# Altium PCB PCB_AgOpenGPS_RTU_2020-12-27_17-55-25.pcbdoc
Units mm, origin at the board's own origin, x right, y up, seen from the top; angles counter-clockwise.
Board outline 75.74 x 81.72 mm, 2 copper layers (Top Layer, Bottom Layer); 14 components, 22 nets, 130 pads, 27 vias.
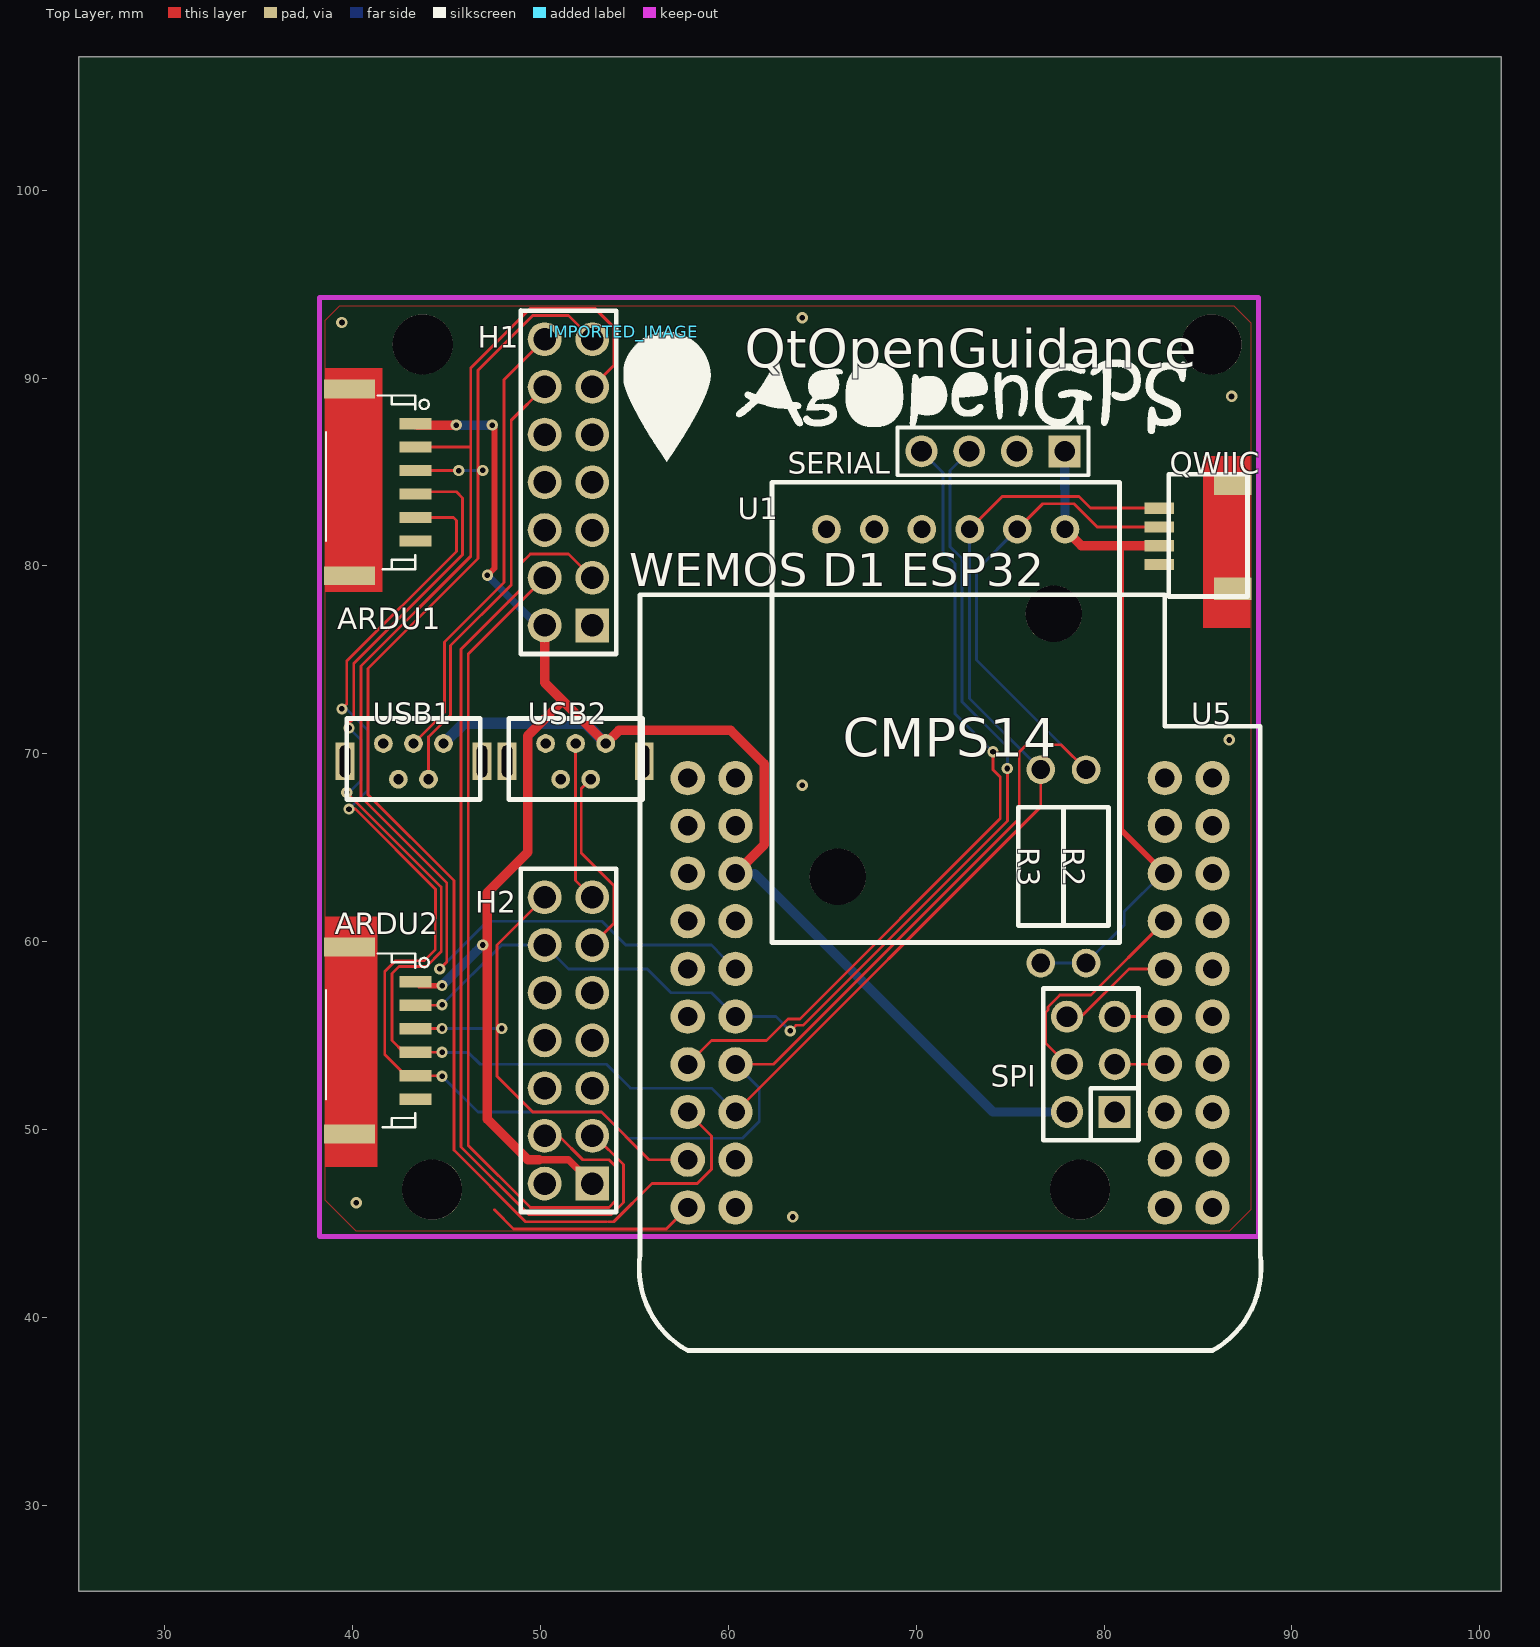
[diagram p0: Top Layer view]
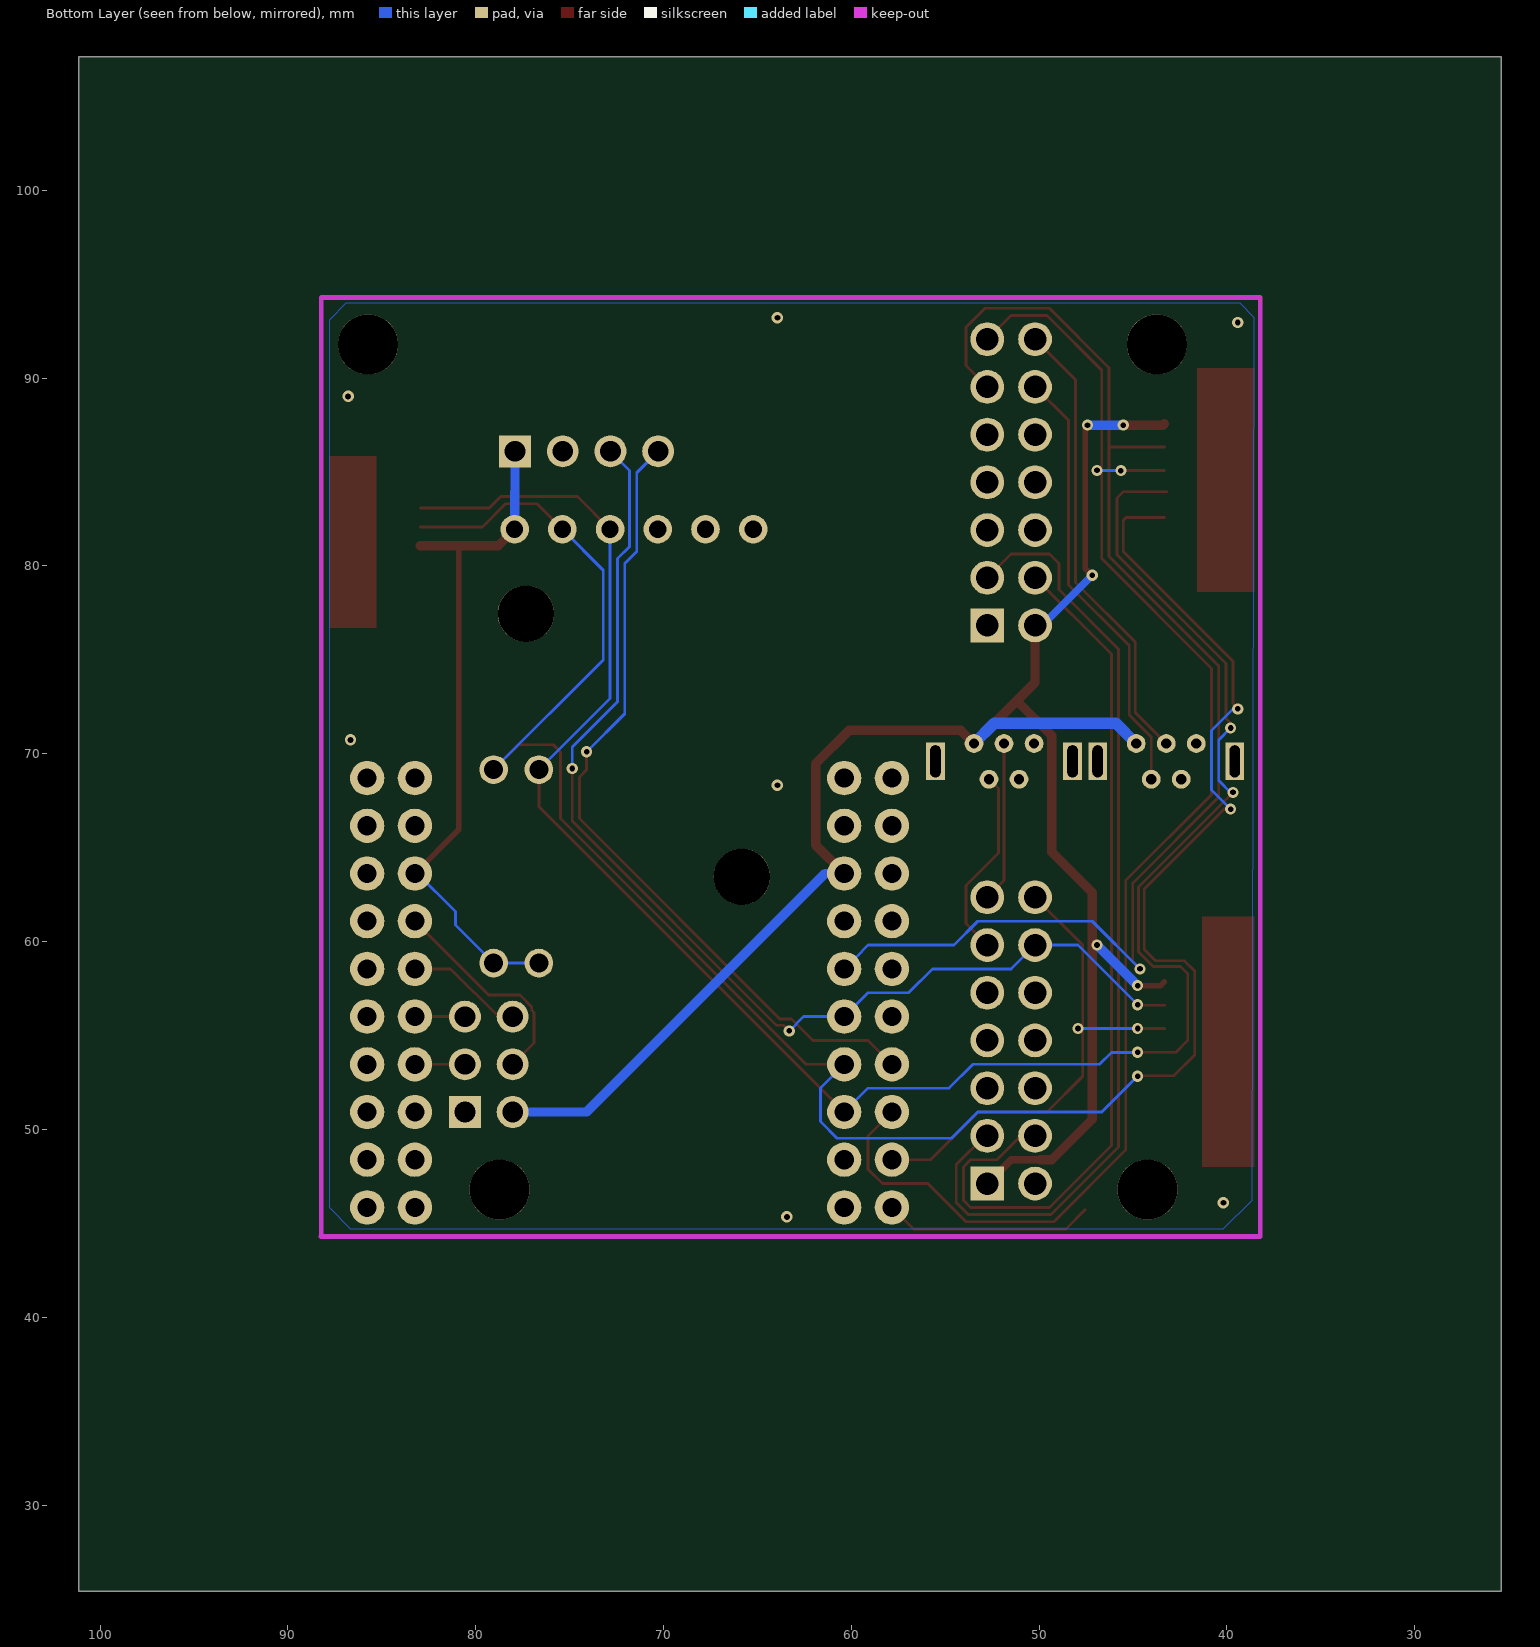
[diagram p1: Bottom Layer view, seen from below]

## Layer stack, top to bottom
Top Layer: signal copper (thickness not stored)
Dielectric: dielectric 0.32, FR-4, Dk 4.8
Bottom Layer: signal copper (thickness not stored)

## Board outline
101.143,25.4 25.4,25.4 25.4,107.124 101.143,107.124

## Components (designator, comment, footprint, x,y, rotation, side; value= is the part's Value field where it differs from the comment)
ARDU1 "SM06B-GHS-TB(LF)(SN)" CONN-TH_SM06B-GHS-TB-LF-SN 41.58,84.455 r270 top
ARDU2 "SM06B-GHS-TB(LF)(SN)" CONN-TH_SM06B-GHS-TB-LF-SN 41.58,54.737 r270 top
H1 "A2541WV-2X7P" HDR-TH_14P-P2.54-V-R2-C7-S2.54_A2541WV-2X7P 51.486,84.455 r90 top
H2 "A2541WV-2X7P" HDR-TH_14P-P2.54-V-R2-C7-S2.54_A2541WV-2X7P 51.486,54.737 r90 top
IMPORTED_IMAGE "IMPORTED_IMAGE" IMPORTED_IMAGE 54.42,92.466 r0 top
QWIIC "QWIIC SMD JST" "QWIIC CONNECTOR" 83.744,81.28 r90 top
R2 "2.2K" RES-TH_BD2.4-L6.3-P10.30-D0.6 79.045,64.008 r270 top
R3 "2.2K" RES-TH_BD2.4-L6.3-P10.30-D0.6 76.632,64.008 r270 top
SERIAL "A2541WV-4P" HDR-TH_4P-P2.54-V 74.092,86.106 r180 top
SPI "PM254V-12-06-H85" HDR-TH_6P-P2.54-V-F-R2-C3-S2.54 79.299,53.467 r90 top
U1 "CMPS14" CMPS14 80.823,84.455 r270 top
U5 "TG_WEMOS_D1_ESP32(CLONE)" "WEMOS-D1 ESP32" 85.776,43.307 r180 top
USB1 "USB-MINI-6.9X10.H-H3.9-DIP-V" MINI-USB-TH_C13453 43.231,69.596 r180 top
USB2 "USB-MINI-6.9X10.H-H3.9-DIP-V" MINI-USB-TH_C13453 51.867,69.596 r180 top

## Footprints (in the part's own frame and the unit in brackets; to place one, negate y for a bottom-side part, rotate by r counter-clockwise, add the part's x,y. Pads: shape width x height; smd on the part's side, far side on the other; paste and mask are expansions set on the pad)
CMPS14 [mm]
  round 1.524 hole 0.914: 1(2.5,-2.9) 2(2.5,-5.44) 3(2.5,-7.98) 4(2.5,-10.52) 5(2.5,-13.06) 6(2.5,-15.6)
  round 3 hole 3 unplated: ""(7,-3.5) ""(21,-15)
  silkscreen extent 0,-18.5 24.5,0
CONN-TH_SM06B-GHS-TB-LF-SN [mil]
  rect 23.6x67 smd: 1(-123.05,68.87) 2(-73.84,68.87) 4(24.59,68.88) 5(73.8,68.88)
  rect 23.7x67 smd: 3(-24.62,68.88) 6(123.01,68.88)
  rect 39.4x106.3 smd: 7(-195.85,-68.86) 8(195.85,-68.87)
  silkscreen extent -182,-118 182,97
HDR-TH_4P-P2.54-V [mm]
  rect 1.7x1.7 hole 1.1: 1(-3.81,0)
  round 1.7 hole 1.1: 2(-1.27,0) 3(1.27,0) 4(3.81,0)
  silkscreen extent -5.08,-1.27 5.08,1.27
HDR-TH_6P-P2.54-V-F-R2-C3-S2.54 [mm]
  rect 1.7x1.7 hole 1.1: 1(-2.54,-1.27)
  round 1.7 hole 1.1: 2(-2.54,1.27) 3(0,-1.27) 4(0,1.27) 5(2.54,-1.27) 6(2.54,1.27)
  silkscreen extent -4.04,-2.54 4.04,2.54
HDR-TH_14P-P2.54-V-R2-C7-S2.54_A2541WV-2X7P [mm]
  rect 1.8x1.8 hole 1.2: 1(-7.62,-1.27)
  round 1.8 hole 1.2: 2(-7.62,1.27) 3(-5.08,-1.27) 4(-5.08,1.27) 5(-2.54,-1.27) 6(-2.54,1.27) 7(0,-1.27) 8(0,1.27) 9(2.54,-1.27) 10(2.54,1.27) 11(5.08,-1.27) 12(5.08,1.27) 13(7.62,-1.27) 14(7.62,1.27)
  silkscreen extent -9.14,-2.54 9.14,2.54
IMPORTED_IMAGE [mm]
  silkscreen extent 0,-6.92 29.95,0
MINI-USB-TH_C13453 [mm]
  round 1 hole 0.55: 1(-1.6,-0.95) 2(-0.8,0.95) 3(0,-0.95) 4(0.8,0.95) 5(1.6,-0.95)
  rect 1x2 hole 0.55 slot 1.7 at 90 deg: 6(3.65,0) 7(-3.65,0)
  silkscreen extent -3.56,-2.29 3.56,2.03
"QWIIC CONNECTOR" [mm]
  rect 0.6x1.55 smd: 1(-1.2,0.8) 2(-0.2,0.8) 3(0.8,0.8) 4(1.8,0.8)
  rect 1.2x2 smd: 5(3.1,-3.1) 6(-2.5,-3.1)
  silkscreen extent -2.9,-3.9 3.6,0.3
RES-TH_BD2.4-L6.3-P10.30-D0.6 [mm]
  round 1.524 hole 1: 1(-5.15,0) 2(5.15,0)
  silkscreen extent -3.15,-1.2 3.15,1.2
"WEMOS-D1 ESP32" [mil]
  round 72 hole 40: 1(0,-100) 2(100,-100) 3(1000,-100) 4(1100,-100) 5(0,-200) 6(100,-200) 7(1000,-200) 8(1100,-200) 9(0,-300) 10(100,-300) 11(1000,-300) 12(1100,-300) 13(0,-400) 14(100,-400) 15(1000,-400) 16(1100,-400) 17(0,-500) 18(100,-500) 19(1000,-500) 20(1100,-500) 21(0,-600) 22(100,-600) 23(1000,-600) 24(1100,-600) 25(0,-700) 26(100,-700) 27(1000,-700) 28(1100,-700) 29(0,-800) 30(100,-800) 31(1000,-800) 32(1100,-800) 33(0,-900) 34(100,-900) 35(1000,-900) 36(1100,-900) 37(0,-1000) 38(1000,-1000) 39(100,-1000) 40(1100,-1000)
  silkscreen extent -102,-1384 1202,200

## Free pads (board coordinates)
  round 3.2 hole 3.2 unplated: ""(43.728,91.798) ""(44.228,46.798) ""(78.728,46.798) ""(85.728,91.798)

## Via types
v1: diameter 0.6, hole 0.3, Top Layer to Bottom Layer, 20 vias
v2: diameter 0.61, hole 0.305, Top Layer to Bottom Layer, 7 vias

## Nets (pads, with @x,y where several pads share a name; then routed paths per layer and width w, separated by ;. In a path a pad name is that pad's centre, name@x,y a point inside that pad or via, vN(x,y) a via of type N, cw(c..) or ccw(c..) an arc to the next point about the centre after c; other vN are vias at no path point)
+3V3: QWIIC.2 R2.2 R3.2 SERIAL.1 U1.1 U5.30 | length 37.1
  Top Layer w0.3: 80.906,81.08 80.906,65.957 U5.30
  Top Layer w0.5: U1.1 78.798,81.08 QWIIC.2
  Bottom Layer w0.15: R3.2 R2.2@79.194,58.858 ; R2.2 81.077,60.889 81.077,61.595 83.109,63.627 U5.30
  Bottom Layer w0.5: SERIAL.1 U1.1
+5V: ARDU1.1 ARDU2.1 H1.2 H2.1 SPI.2 U5.31 USB1.1 USB2.1 | length 108
  Top Layer w0.3: ARDU2.1 43.534,57.658 v1(44.755,57.658) ; v1(47.168,79.502) 47.549,79.883 47.549,85.217 47.549,87.376 v1(47.422,87.503)
  Top Layer w0.4: 49.936,48.387 51.486,48.387 H2.1
  Top Layer w0.5: ARDU1.1 43.407,87.503 v1(45.517,87.503) ; 49.936,48.387 49.327,48.387 47.168,50.546 47.168,62.611 49.327,64.77 49.327,70.97 51.184,72.829 ; H1.2 50.216,73.797 USB2.1 54.168,71.247 60.122,71.247 61.9,69.469 61.9,65.151 U5.31
  Bottom Layer w0.4: v1(47.168,79.502) 49.835,76.835 H1.2
  Bottom Layer w0.5: v1(44.755,57.658) 46.548,59.451 v1(46.914,59.817) ; v1(45.517,87.503) v1(47.422,87.503) ; U5.31 61.392,63.627 74.092,50.927 SPI.2
  Bottom Layer w0.6: USB1.1 45.913,71.628 52.385,71.628 USB2.1
F9P'_1>2: H1.3 H2.3 | length 51.6
  Top Layer w0.15: H2.3 52.883,49.657 54.407,48.133 54.407,46.101 53.772,45.466 49.367,45.466 45.771,49.063 45.771,75.565 48.946,78.74 48.946,80.137 49.454,80.645 51.486,80.645 H1.3
F9P_2'>1: H1.4 H2.4 | length 47.6
  Top Layer w0.15: H2.4 50.978,49.657 52.248,48.387 53.645,48.387 54.026,48.006 54.026,46.228 53.645,45.847 49.454,45.847 46.152,49.149 46.152,75.311 H1.4
GND: ARDU1.6 ARDU1.7 ARDU1.8 ARDU2.6 ARDU2.7 ARDU2.8 H1.1 H2.2 QWIIC.1 QWIIC.5 QWIIC.6 SERIAL.2 SPI.1 U1.6 U5.1 U5.4 U5.27 USB1.5 USB1.6 USB1.7 USB2.5 USB2.6 USB2.7 | length 11.2
  Top Layer w0.15: 47.549,45.72 48.565,44.704 56.693,44.704 U5.4
  other v2: 63.424,45.339 40.183,46.101 63.932,68.326 86.665,70.739 86.792,89.027 39.421,92.964 63.932,93.218
MISO: SPI.5 U5.18 | length 2.7
  Top Layer w0.15: SPI.5 U5.18
MOSI: SPI.6 U5.22 | length 6.3
  Top Layer w0.15: SPI.6 78.791,56.007 81.331,58.547 U5.22
RXD1: ARDU1.2 H1.11 U5.23 | length 70.3
  Top Layer w0.15: ARDU1.2 46.279,86.331 ; v1(44.628,58.547) 45.009,58.928 45.009,63.119 40.437,67.691 40.437,74.676 46.279,80.518 46.279,90.551 49.454,93.726 52.883,93.726 53.899,92.71 53.899,90.678 H1.11
  Bottom Layer w0.15: v1(44.628,58.547) 47.168,61.087 53.264,61.087 54.534,59.817 59.106,59.817 U5.23@60.328,58.537
RXD2: ARDU2.2 H2.12 SERIAL.3 U5.19 | length 60.8
  Top Layer w0.15: ARDU2.2 44.724,56.612 v1(44.755,56.642) ; U5.19@60.328,55.999 U5.19@60.368,55.999 ; v1(63.297,55.245) 63.594,55.542 63.975,55.542 74.854,66.421 v1(74.854,69.215)
  Bottom Layer w0.15: v1(44.755,56.642) 47.93,59.817 H2.12 51.486,58.547 55.677,58.547 56.947,57.277 59.106,57.277 U5.19 62.535,56.007 v1(63.297,55.245) ; SERIAL.3 71.806,85.09 71.806,81.026 72.441,80.391 72.441,72.771 74.854,70.358 v1(74.854,69.215)
S$6: 
S$8: 
SCK: SPI.3 U5.14 | length 2.7
  Top Layer w0.15: SPI.3 U5.14
SCL: ARDU1.4 ARDU2.4 QWIIC.4 R3.1 U1.3 U5.11 | length 109
  Top Layer w0.15: v1(39.675,67.945) 44.707,62.913 44.707,59.461 43.919,58.674 42.469,58.674 42.088,58.293 42.088,54.737 42.713,54.112 ARDU2.4 v1(44.755,54.102) ; v1@39.675,71.501 40.056,71.882 40.056,74.803 45.85,80.597 45.85,83.614 45.507,83.957 ARDU1.4@43.203,83.957 ; U5.11 76.632,67.183 R3.1 ; U1.3 74.582,83.693 78.664,83.693 79.276,83.081 QWIIC.4
  Bottom Layer w0.15: v1(39.675,67.945) 39.802,67.945 40.437,68.58 40.437,70.739 v1(39.802,71.374) ; v1(44.755,54.102) 46.152,54.102 46.787,53.467 53.518,53.467 54.788,52.197 59.106,52.197 U5.11 ; U1.3 72.843,72.947 R3.1
SDA: ARDU1.5 ARDU2.5 QWIIC.3 R2.1 U1.2 U5.15 | length 117.3
  Top Layer w0.15: v1(39.421,72.39) 39.675,72.644 39.675,74.93 45.517,80.772 45.517,82.423 45.359,82.58 ARDU1.5 ; v1(39.802,67.056) 40.137,67.056 44.404,62.789 44.397,59.586 43.787,58.976 42.263,58.976 41.707,58.42 41.707,53.975 42.819,52.862 ARDU2.5 44.724,52.862 v1(44.755,52.832) ; U5.15 62.408,53.467 75.489,66.548 75.489,70.104 75.87,70.485 77.719,70.485 R2.1 ; U1.2 76.741,83.312 78.41,83.312 79.642,82.08 QWIIC.3
  Bottom Layer w0.15: v1(39.421,72.39) 39.675,72.39 40.818,71.247 40.818,68.072 v1(39.802,67.056) ; v1(44.755,52.832) 46.66,50.927 53.264,50.927 54.661,49.53 60.757,49.53 61.646,50.419 61.646,52.197 U5.15 ; U1.2 73.203,79.776 73.203,75.001 R2.1
SS_SPI: SPI.4 U5.26 | length 11.7
  Top Layer w0.15: SPI.4 76.886,54.61 76.886,56.234 77.013,56.361 77.013,56.515 77.648,57.15 79.299,57.15 U5.26
TXD1: ARDU1.3 H1.13 U5.12 | length 78.8
  Top Layer w0.15: ARDU1.3 v1(45.644,85.08) ; 46.66,84.609 46.66,84.836 v1(46.914,85.09) ; v1@46.66,85.08 46.669,85.09 v1(46.914,85.09) ; 46.66,85.725 46.66,85.344 v1(46.914,85.09) ; H1.13 51.486,93.345 49.581,93.345 46.66,90.424 46.66,80.391 40.818,74.549 40.818,67.818 45.39,63.246 45.39,48.895 49.2,45.085 53.518,45.085 ; 53.63,45.085 53.899,45.085 55.931,47.117 58.344,47.117 59.106,47.879 59.106,49.657 U5.12
  Bottom Layer w0.15: v1(45.644,85.08) 45.653,85.09 v1(46.914,85.09)
TXD2: ARDU2.3 H2.14 U5.8 | length 28.7
  Top Layer w0.15: ARDU2.3 43.339,55.372 v1(44.755,55.372) ; 47.676,54.731 47.676,55.118 v1(47.93,55.372) 47.676,55.626 47.676,56.066 ; H2.14 47.676,59.817 47.676,52.832 49.581,50.927 53.235,50.927 55.775,48.387 U5.8
  Bottom Layer w0.15: v1(44.755,55.372) v1(47.93,55.372)
TXDX: SERIAL.4 U5.16 | length 43.3
  Top Layer w0.15: U5.16 59.106,54.737 62.034,54.737 63.177,55.88 63.805,55.88 74.473,66.548 74.473,68.768 74.092,69.149 v1(74.092,70.104)
  Bottom Layer w0.15: SERIAL.4 71.425,84.963 71.425,80.772 72.06,80.137 72.06,72.136 v1(74.092,70.104)
USB_D+1: H1.14 USB1.3 | length 24.4
  Top Layer w0.15: USB1.3 44.882,72.197 44.882,75.946 48.057,79.121 48.057,89.916 H1.14
USB_D+2: H2.13 USB2.3 | length 8.6
  Top Layer w0.15: USB2.3 51.867,63.246 H2.13
USB_D-1: H1.12 USB1.2 | length 23.5
  Top Layer w0.15: USB1.2 44.031,70.904 45.202,72.075 45.202,75.758 48.438,78.994 48.438,87.757 H1.12
USB_D-2: H2.11 USB2.2 | length 10.2
  Top Layer w0.15: USB2.2 52.169,68.148 52.169,64.722 53.899,62.992 53.899,60.96 H2.11
pads on no net: H1.5 H1.6 H1.7 H1.8 H1.9 H1.10 H2.5 H2.6 H2.7 H2.8 H2.9 H2.10 U1. U1.4 U1.5 U5.2 U5.3 U5.5 U5.6 U5.7 U5.9 U5.10 U5.13 U5.17 U5.20 U5.21 U5.24 U5.25 U5.28 U5.29 U5.32 U5.33 U5.34 U5.35 U5.36 U5.37 U5.38 U5.39 U5.40 USB1.4 USB2.4

## Polygon pours and split planes (outlines as drawn)
GND on Bottom Layer (solid): 38.532,93.218 39.294,93.98 41.961,93.98 86.919,93.98 87.808,93.091 87.808,45.847 86.665,44.704 40.183,44.704 38.659,46.228
GND on Top Layer (solid): 38.532,93.091 39.294,93.853 86.919,93.853 87.808,92.964 87.808,45.72 86.665,44.577 40.183,44.577 38.659,46.101 38.532,46.228

## Other copper
Top Layer:
  rectangle net GND: 85.268,76.708 87.808,85.852
  rectangle net GND: 38.532,48.006 41.326,61.341
  rectangle net GND: 38.532,78.613 41.58,90.551

## Silkscreen, mask and mechanical layers (free items; w line width, h text height)
Top Overlay:
  text "QtOpenGuidance" at 60.884,90.551 h2.03

## Text inside footprints (layer, text, board x,y; h text height)
QWIIC: Document "SCL" at 84.244,82.88 h0.2 r90; Document "SDA" at 84.244,81.78 h0.2 r90; Document "3.3V" at 84.244,80.78 h0.2 r90; Document "GND" at 84.244,79.78 h0.2 r90
U5: Top Overlay "WEMOS D1 ESP32" at 54.728,78.909 h1.78